# EAGLE board central_carrinho (EAGLE 6.5.0)

Size 99.04 x 75.87 mm. Coordinates in mm from the lower left corner, seen from the top.
Outline: 0,0 99.04,0 99.04,75.87 0,75.87 0,0
Copper layers (1*16): Top 0.035mm / dielectric 1.5mm / Bottom 0.035mm
Design rules "default *": minimum track width 40mil, minimum drill 24mil, track to track 15mil, track to pad 15mil, pad to pad 15mil, via to via 15mil, smd to smd 8mil, copper to edge 40mil, drill to drill 8mil, minimum pad ring 15mil, minimum via ring 8mil, stop-mask expansion 4mil, vias tented up to drill 0mil, thermal gap 10mil

## Footprints (pad centres in the part's own frame; a part is rotated, then mirrored left to right if it is on the bottom)
W237-102 = drill 1.194 long: 1 -2.5,-1.27; 2 2.5,-1.27
DIL28-3 = drill 0.813 long: 1 -16.51,-3.81; 2 -13.97,-3.81; 3 -11.43,-3.81; 4 -8.89,-3.81; 5 -6.35,-3.81; 6 -3.81,-3.81; 7 -1.27,-3.81; 8 1.27,-3.81; 9 3.81,-3.81; 10 6.35,-3.81; 11 8.89,-3.81; 12 11.43,-3.81; 13 13.97,-3.81; 14 16.51,-3.81; 15 16.51,3.81; 16 13.97,3.81; 17 11.43,3.81; 18 8.89,3.81; 19 6.35,3.81; 20 3.81,3.81; 21 1.27,3.81; 22 -1.27,3.81; 23 -3.81,3.81; 24 -6.35,3.81; 25 -8.89,3.81; 26 -11.43,3.81; 27 -13.97,3.81; 28 -16.51,3.81
TO220V = drill 1.016 long: 1 -2.54,-2.54; 2 0,-2.54; 3 2.54,-2.54
LED3MM = drill 0.813 octagon: A -1.27,0; K 1.27,0
0207/7 = drill 0.813 octagon: 1 -3.81,0; 2 3.81,0
MA05-1 = drill 1.016 long: 1 -5.08,0; 2 -2.54,0; 3 0,0; 4 2.54,0; 5 5.08,0
MA13-1 = drill 1.016 long: 1 -15.24,0; 2 -12.7,0; 3 -10.16,0; 4 -7.62,0; 5 -5.08,0; 6 -2.54,0; 7 0,0; 8 2.54,0; 9 5.08,0; 10 7.62,0; 11 10.16,0; 12 12.7,0; 13 15.24,0

## Placement (x,y rotation side)
CC  [W237-102]  17.78,34.29 90 top
CC1  [W237-102]  17.78,1.27 0 top
CC2  [W237-102]  -21.59,-49.53 0 top  (outside the outline)
IC1  ATMEGA168-PU  [DIL28-3]  50.8,40.64 270 top
IC2  7805TV  [TO220V]  24.13,45.72 270 top
LED1  [LED3MM]  49.53,16.51 270 top
Q1  [TO220V]  31.75,22.86 270 top
Q2  [TO220V]  22.86,8.89 270 top
Q3  [TO220V]  31.75,8.89 270 top
Q4  [TO220V]  22.86,22.86 270 top
Q5  [TO220V]  82.55,20.32 270 top
Q6  [TO220V]  91.44,20.32 270 top
Q7  [TO220V]  86.36,7.62 90 top
Q8  [TO220V]  78.74,7.62 90 top
R1  [0207/7]  41.91,21.59 270 top
R2  [0207/7]  41.91,34.29 90 top
R3  [0207/7]  38.1,17.78 270 top
R4  [0207/7]  36.83,29.21 90 top
R5  [0207/7]  64.77,27.94 0 top
R6  [0207/7]  59.69,2.54 0 top
R7  [0207/7]  64.77,22.86 0 top
R8  [0207/7]  63.5,12.7 0 top
R27  220  [0207/7]  49.53,11.43 180 top
SV1  [MA05-1]  52.07,64.77 0 top
SV2  [MA13-1]  72.39,52.07 90 top

## Library data of the parts
CC CC1 CC2 = con-wago-500; MPN: 237-102; OC_FARNELL: unknown; OC_NEWARK: 70K9898
IC1 = Arduino-AVR
IC2 = linear
LED1 = led
Q1-Q8 = transistor
R1-R8 R27 = rcl
SV1 SV2 = con-lstb; OC_FARNELL: unknown; OC_NEWARK: unknown

## Nets
A0: IC1.23 SV2.1
A1: IC1.24 SV2.2
A2: IC1.25 SV2.3
A3: IC1.26 SV2.4
A4: IC1.27 SV2.5
A5: IC1.28 SV2.6
D0: IC1.2 SV2.7
D1: IC1.3 SV2.8
D4: IC1.6 SV2.9
D5: IC1.11 R2.1 R4.1
D6: IC1.12 R1.1 R3.1
D7: IC1.13 SV2.10
D8: IC1.14 SV2.11
D9: IC1.15 R6.1 R8.1
D10: IC1.16 R5.1 R7.1
D11: IC1.17 SV2.12
D12: IC1.18 SV2.13
D13: IC1.19 LED1.A
GND: CC.1 IC1.8 IC1.22 IC2.2 Q2.3 Q3.3 Q6.3 Q7.3 R27.2 SV1.4
N$1: Q2.1 R4.2
N$2: Q1.1 R1.2
N$3: Q4.1 R2.2
N$4: Q3.1 R3.2
N$5: Q6.1 R8.2
N$6: Q5.1 R5.2
N$7: LED1.K R27.1
N$8: Q8.1 R6.2
N$9: Q7.1 R7.2
OUT1: CC1.1 Q1.3 Q2.2
OUT2: CC1.2 Q3.2 Q4.3
OUT3: CC2.1 Q5.3 Q6.2
OUT4: CC2.2 Q7.2 Q8.3
RESET: IC1.1 SV1.1
RX: IC1.5 SV1.2
TX: IC1.4 SV1.3
VCC: IC1.7 IC1.20 IC2.3 SV1.5
VIN: CC.2 IC2.1 Q1.2 Q4.2 Q5.2 Q8.2

## Tracks (layer width: path | path; a pad name or v marks a point on that pad's centre or on a via)
A0  (1 unrouted)
A1  (1 unrouted)
A2  (1 unrouted)
A3  (1 unrouted)
A4  (1 unrouted)
A5  (1 unrouted)
D0  (1 unrouted)
D1  (1 unrouted)
D4  (1 unrouted)
D5  (2 unrouted)
D6  (2 unrouted)
D7  (1 unrouted)
D8  (1 unrouted)
D9  (2 unrouted)
D10  (2 unrouted)
D11  (1 unrouted)
D12  (1 unrouted)
D13  (1 unrouted)
GND  (9 unrouted)
N$1  (1 unrouted)
N$2  (1 unrouted)
N$3  (1 unrouted)
N$4  (1 unrouted)
N$5  (1 unrouted)
N$6  (1 unrouted)
N$7  (1 unrouted)
N$8  (1 unrouted)
N$9  (1 unrouted)
OUT1  (2 unrouted)
OUT2  (2 unrouted)
OUT3  (2 unrouted)
OUT4  (2 unrouted)
RESET  (1 unrouted)
RX  (1 unrouted)
TX  (1 unrouted)
VCC  (3 unrouted)
VIN  (5 unrouted)